# Altium PCB PIFWRobot-Board.PcbDoc
Units mil, origin at the board's own origin, x right, y up, seen from the top; angles counter-clockwise.
Board outline 6000 x 4000 mil, 2 copper layers (Top Layer, Bottom Layer); 141 components, 106 nets, 462 pads, 0 vias.
Unrouted connection lines stored in the file: 224.
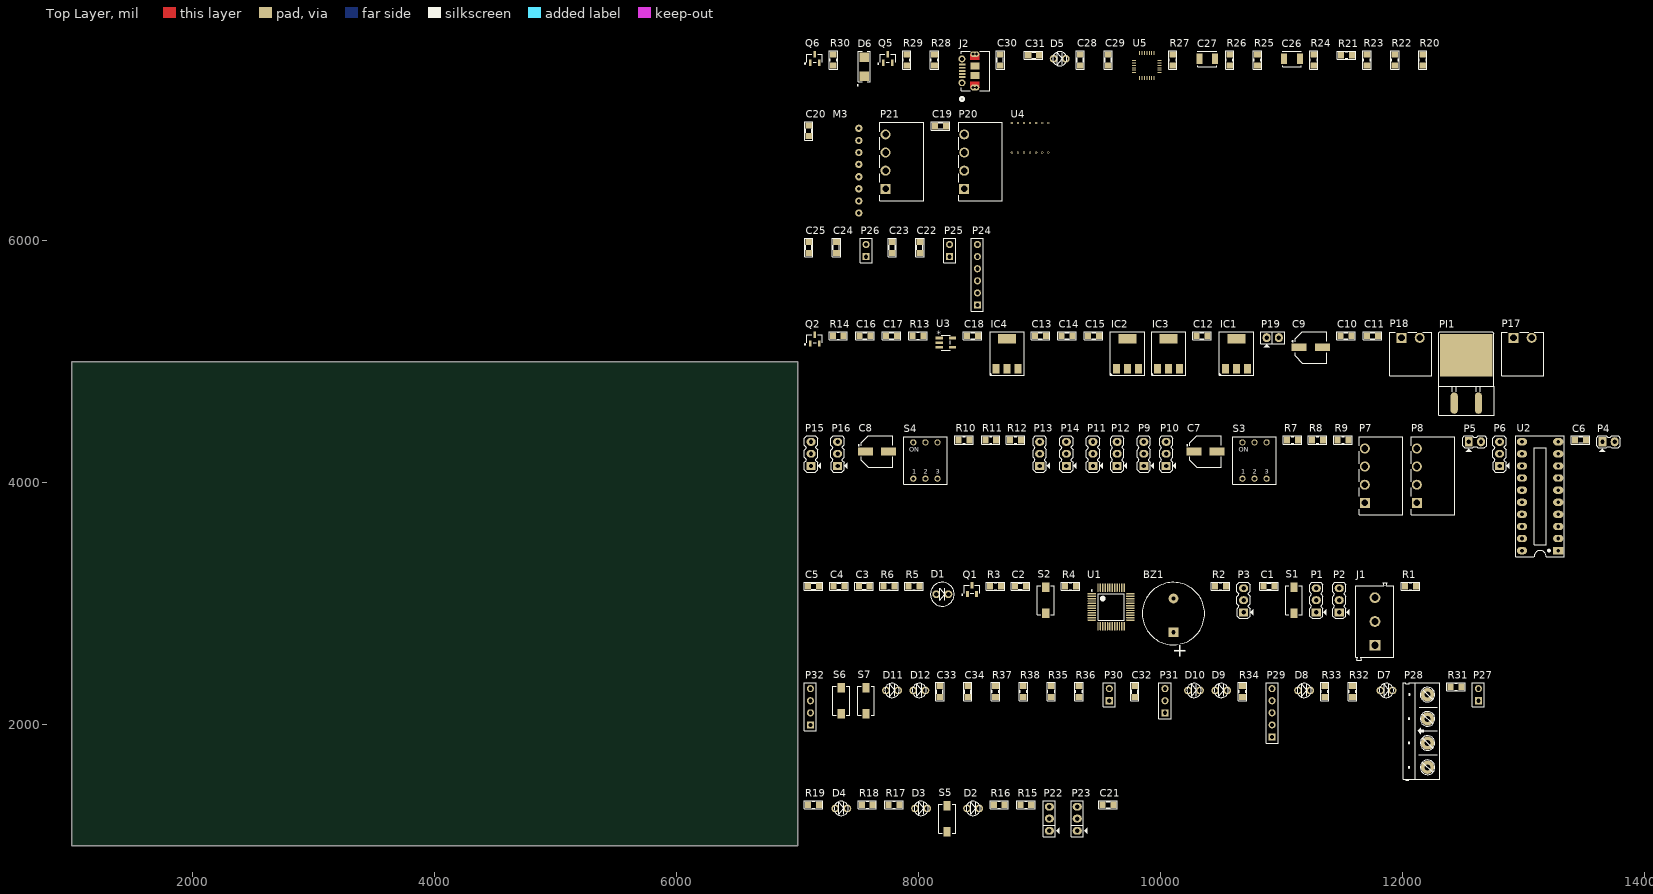
[diagram p0: Top Layer view]
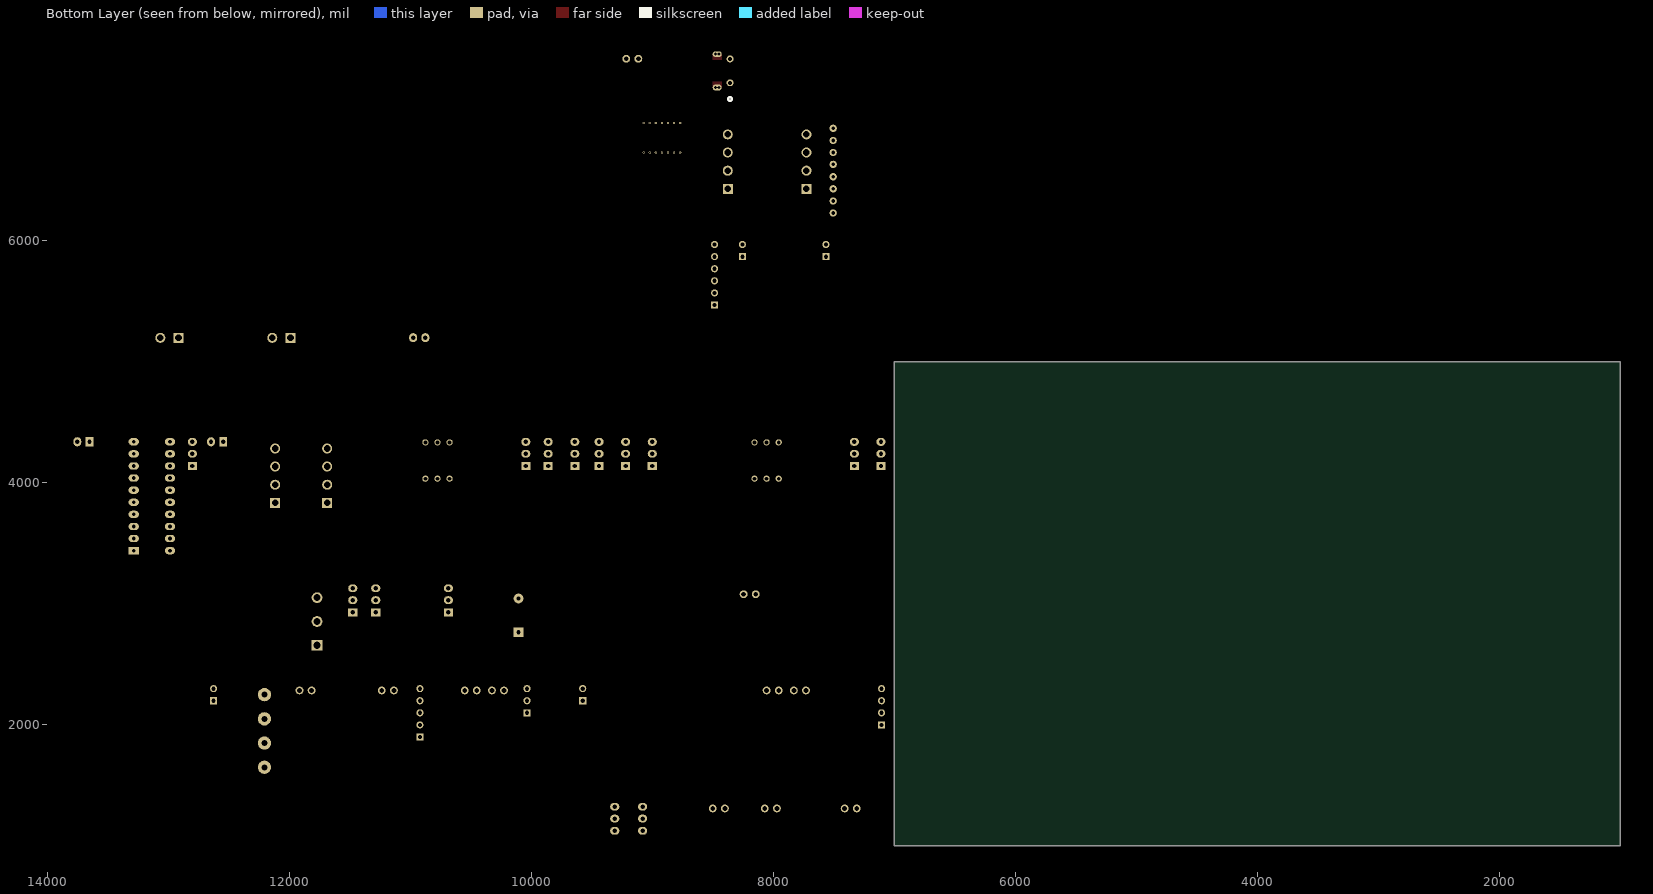
[diagram p1: Bottom Layer view, seen from below]

## Layer stack, top to bottom
Top Solder: solder mask 0.4, Solder Resist, Dk 3.5
Top Layer: signal copper 1.4
Dielectric 1: dielectric 12.6, FR-4, Dk 4.8
Bottom Layer: signal copper 1.4
Bottom Solder: solder mask 0.4, Solder Resist, Dk 3.5

## Board outline
1000,1000 7000,1000 7000,5000 1000,5000

## Design rules (kind name [scope] priority, off if disabled: settings)
Clearance [All] p1: gap=10 ignorepadtopadclearanceinfootprint=FALSE except(0: Arc-Hole Track-Hole SMDPad-Hole THPad-Hole Via-Hole Fill-Hole Poly-Hole Region-Hole Text-Hole)
PolygonConnect [All] p1: connectstyle=Relief reliefconductorwidth=10 reliefentries=4 polygonreliefangle="90 Angle" airgapwidth=10
RoomDefinition WIFI [InComponentClass('WIFI')] p1: confinementstyle=ConfineIn formatcopy=TRUE lockcomponents=FALSE outline 7045,7140 12315,7140 12315,7680 7045,7680
RoomDefinition SENSOR [InComponentClass('SENSOR')] p2: confinementstyle=ConfineIn formatcopy=TRUE lockcomponents=FALSE outline 7045,6180 9100,6180 9100,7095 7045,7095
RoomDefinition RF [InComponentClass('RF')] p3: confinementstyle=ConfineIn formatcopy=TRUE lockcomponents=FALSE outline 7045,5410 8620,5410 8620,6130 7045,6130
RoomDefinition POWER [InComponentClass('POWER')] p4: confinementstyle=ConfineIn formatcopy=TRUE lockcomponents=FALSE outline 7045,4550 13180,4550 13180,5360 7045,5360
RoomDefinition "MOTOR CONTROL" [InComponentClass('MOTOR CONTROL')] p5: confinementstyle=ConfineIn formatcopy=TRUE lockcomponents=FALSE outline 7045,3340 13810,3340 13810,4500 7045,4500
RoomDefinition MCU [InComponentClass('MCU')] p6: confinementstyle=ConfineIn formatcopy=TRUE lockcomponents=FALSE outline 7045,2515 12150,2515 12150,3290 7045,3290
RoomDefinition DECAWAVE [InComponentClass('DECAWAVE')] p7: confinementstyle=ConfineIn formatcopy=TRUE lockcomponents=FALSE outline 7045,1535 12760,1535 12760,2460 7045,2460
RoomDefinition BLUETOOTH [InComponentClass('BLUETOOTH')] p8: confinementstyle=ConfineIn formatcopy=TRUE lockcomponents=FALSE outline 7045,1065 9655,1065 9655,1485 7045,1485
RoutingVias [All] p1: holewidth=28 width=50 viastyle="Through Hole" minholewidth=28 minwidth=50 maxholewidth=28 maxwidth=50
SolderMaskExpansion [All] p1: expansion=4
Width [All] p1: maxlimit=10 minlimit=10 preferedwidth=10
30 further rules are at their usual default settings.

## Classes and differential pairs
component class WIFI: C26 C27 C28 C29 C30 C31 D5 D6 J2 M10 Q3 Q4 Q5 Q6 R20 R21 R22 R23 R24 R25 R26 R27 R28 R29 R30 U5
component class SENSOR: C19 C20 M3 P20 P21 U4
component class RF: C22 C23 C24 C25 M6 M7 M8 M9 P24 P25 P26
component class POWER: C9 C10 C11 C12 C13 C14 C15 C16 C17 C18 IC1 IC2 IC3 IC4 P17 P18 P19 PI1 Q2 R13 R14 U3
component class "MOTOR CONTROL": C6 C7 C8 M1 M2 P4 P5 P6 P7 P8 P9 P10 P11 P12 P13 P14 P15 P16 R7 R8 R9 R10 R11 R12 S3 S4 U2
component class MCU: BZ1 C1 C2 C3 C4 C5 D1 J1 P1 P2 P3 Q1 R1 R2 R3 R4 R5 R6 S1 S2 U1
component class DECAWAVE: C32 C33 C34 D7 D8 D9 D10 D11 D12 P27 P28 P29 P30 P31 P32 R31 R32 R33 R34 R35 R36 R37 R38 S6 S7 U6
component class BLUETOOTH: * C21 D2 D3 D4 M5 P22 P23 R15 R16 R17 R18 R19 S5

## Components (designator, comment, footprint, x,y, rotation, side; value= is the part's Value field where it differs from the comment)
BZ1 "Buzzer" BUZZER 10105,2765 r90 top
C1 "Cap-100nF-50V-0805" CAP-SM-0805 10850,3145 r0 top value=100nF/50V
C2 "Cap-100nF-50V-0805" CAP-SM-0805 8795,3145 r0 top value=100nF/50V
C3 "Cap-100nF-50V-0805" CAP-SM-0805 7505,3145 r0 top value=100nF/50V
C4 "Cap-100nF-50V-0805" CAP-SM-0805 7295,3145 r0 top value=100nF/50V
C5 "Cap-100nF-50V-0805" CAP-SM-0805 7085,3145 r0 top value=100nF/50V
C6 "Cap-100nF-50V-0805" CAP-SM-0805 13425,4355 r0 top value=100nF/50V
C7 "Cap-Al-100uF-16V-D6L5" CAP-SM-AL-SIZE-D-D6L6 10370,4260 r0 top value=100uF/16V
C8 "Cap-Al-100uF-16V-D6L5" CAP-SM-AL-SIZE-D-D6L6 7655,4260 r0 top value=100uF/16V
C9 "Cap-Al-100uF-16V-D6L5" CAP-SM-AL-SIZE-D-D6L6 11240,5120 r0 top value=100uF/16V
C10 "Cap-10uF-50V-0805" CAP-SM-0805 11485,5215 r0 top value=10uF/50V
C11 "Cap-10uF-50V-0805" CAP-SM-0805 11705,5215 r0 top value=10uF/50V
C12 "Cap-10uF-50V-0805" CAP-SM-0805 10295,5215 r0 top value=10uF/50V
C13 "Cap-10uF-50V-0805" CAP-SM-0805 8960,5215 r0 top value=10uF/50V
C14 "Cap-10uF-50V-0805" CAP-SM-0805 9180,5215 r0 top value=10uF/50V
C15 "Cap-10uF-50V-0805" CAP-SM-0805 9400,5215 r0 top value=10uF/50V
C16 "Cap-10uF-50V-0805" CAP-SM-0805 7510,5215 r0 top value=10uF/50V
C17 "Cap-10uF-50V-0805" CAP-SM-0805 7730,5215 r0 top value=10uF/50V
C18 "Cap-10uF-50V-0805" CAP-SM-0805 8400,5215 r0 top value=10uF/50V
C19 "Cap-100nF-50V-0805" CAP-SM-0805 8135,6950 r0 top value=100nF/50V
C20 "Cap-100nF-50V-0805" CAP-SM-0805 7090,6865 r90 top value=100nF/50V
C21 "Cap-100nF-50V-0805" CAP-SM-0805 9520,1340 r0 top value=100nF/50V
C22 "Cap-100nF-50V-0805" CAP-SM-0805 8010,5900 r90 top value=100nF/50V
C23 "Cap-100nF-50V-0805" CAP-SM-0805 7780,5900 r90 top value=100nF/50V
C24 "Cap-100nF-50V-0805" CAP-SM-0805 7320,5900 r90 top value=100nF/50V
C25 "Cap-100nF-50V-0805" CAP-SM-0805 7090,5900 r90 top value=100nF/50V
C26 "TAJB107M006RNJ" CAP_SM_TAN 11085,7505 r0 top value=100uF/16V
C27 "TAJB107M006RNJ" CAP_SM_TAN 10385,7505 r0 top value=100uF/16V
C28 "Cap-10uF-50V-0805" CAP-SM-0805 9335,7450 r90 top value=10uF/50V
C29 "Cap-100nF-50V-0805" CAP-SM-0805 9565,7450 r90 top value=100nF/50V
C30 "Cap-10uF-50V-0805" CAP-SM-0805 8675,7450 r90 top value=10uF/50V
C31 "Cap-100nF-50V-0805" CAP-SM-0805 8905,7535 r0 top value=100nF/50V
C32 "Cap-100nF-50V-0805" CAP-SM-0805 9785,2230 r90 top value=100nF/50V
C33 "Cap-100nF-50V-0805" CAP-SM-0805 8175,2230 r90 top value=100nF/50V
C34 "Cap-100nF-50V-0805" CAP-SM-0805 8405,2230 r90 top value=100nF/50V
D1 "LED-RED-5MM" LED-5MM-RED 8145,3080 r0 top
D2 "LED-GREEN-3MM" LED-3MM-GREEN 8400,1310 r0 top
D3 "LED-YELLOW-3MM" LED-3MM-YELLOW 7970,1310 r0 top
D4 "LED-RED-3MM" LED-3MM-RED 7310,1310 r0 top
D5 "LED-RED-3MM" LED-3MM-RED 9115,7505 r0 top
D6 "SS14" SS14 7550,7440 r90 top
D7 "LED-RED-3MM" LED-3MM-RED 11815,2285 r0 top
D8 "LED-RED-3MM" LED-3MM-RED 11135,2285 r0 top
D9 "LED-YELLOW-3MM" LED-3MM-YELLOW 10450,2285 r0 top
D10 "LED-GREEN-3MM" LED-3MM-GREEN 10225,2285 r0 top
D11 "LED-RED-3MM" LED-3MM-RED 7730,2285 r0 top
D12 "LED-RED-3MM" LED-3MM-RED 7955,2285 r0 top
IC1 "AMS1117" SOT223 10625,5050 r0 top value=LM317
IC2 "AMS1117" SOT223 9725,5050 r0 top value=LM317
IC3 "AMS1117" SOT223 10065,5050 r0 top value=LM317
IC4 "AMS1117" SOT223 8730,5050 r0 top value=LM317
J1 "691111710003" 691111710003 11770,2855 r90 top
J2 "105017-0001" CONN_105017-0001 8470,7405 r90 top
M3 "GY9250" GY9250 7505,6230 r90 top
P1 "Header 3" JP3#1 11285,3030 r90 top
P2 "Header 3" JP3#1 11475,3030 r90 top
P3 "Header 3" JP3#1 10685,3030 r90 top
P4 "Header 2" JP2#1 13650,4340 r0 top
P5 "Header 2" JP2#1 12545,4340 r0 top
P6 "Header 3" JP3#1 12800,4240 r90 top
P7 "691322310004" 691322310004 11820,4060 r90 top
P8 "691322310004" 691322310004 12250,4060 r90 top
P9 "Header 3" JP3#1 9860,4240 r90 top
P10 "Header 3" JP3#1 10045,4240 r90 top
P11 "Header 3" JP3#1 9440,4240 r90 top
P12 "Header 3" JP3#1 9640,4240 r90 top
P13 "Header 3" JP3#1 9000,4240 r90 top
P14 "Header 3" JP3#1 9220,4240 r90 top
P15 "Header 3" JP3#1 7110,4240 r90 top
P16 "Header 3" JP3#1 7330,4240 r90 top
P17 "691322310002" 691322310002 12990,5065 r0 top
P18 "691322310002" 691322310002 12065,5065 r0 top
P19 "Header 2" JP2#2 10875,5200 r0 top
P20 "691322310004" 691322310004 8510,6655 r90 top
P21 "691322310004" 691322310004 7860,6655 r90 top
P22 "Header 3" JP3#2 9080,1225 r90 top
P23 "Header 3" JP3#2 9310,1225 r90 top
P24 "Header 6" HDR1X6 8485,5470 r90 top
P25 "Header 2" HDR1X2 8255,5870 r90 top
P26 "Header 2" HDR1X2 7565,5870 r90 top
P27 "Header 2" HDR1X2 12625,2200 r90 top
P28 "Header 4" HED4 12205,1650 r90 top
P29 "Header 5" HDR1X5 10920,1900 r90 top
P30 "Header 2" HDR1X2 9575,2200 r90 top
P31 "Header 3" HDR1X3 10035,2100 r90 top
P32 "Header 4" HDR1X4 7105,2000 r90 top
PI1 "L7805" D2PAK 12425,4660 r0 top
Q1 "MMBT3904-1AM" SOT23_NEX 8440,3120 r0 top
Q2 "MMBT3904-1AM" SOT23_NEX 7140,5190 r0 top
Q5 "S8050" SOT23_NEX 7745,7510 r0 top
Q6 "S8050" SOT23_NEX 7140,7510 r0 top
R1 "Res-10k-0805" RES-SM-0805 12020,3145 r0 top value=10K
R2 "Res-10k-0805" RES-SM-0805 10450,3145 r0 top value=10K
R3 "Res-15K-0805" RES-SM-0805 8590,3145 r0 top value=15K
R4 "Res-100K-0805" RES-SM-0805 9210,3145 r0 top value=100K
R5 "Res-100K-0805" RES-SM-0805 7915,3145 r0 top value=100K
R6 "Res-1K-0805" RES-SM-0805 7710,3145 r0 top value=1K
R7 "Res-1K-0805" RES-SM-0805 11045,4355 r0 top value=1K
R8 "Res-1K-0805" RES-SM-0805 11250,4355 r0 top value=1K
R9 "Res-1K-0805" RES-SM-0805 11460,4355 r0 top value=1K
R10 "Res-1K-0805" RES-SM-0805 8330,4355 r0 top value=1K
R11 "Res-1K-0805" RES-SM-0805 8550,4355 r0 top value=1K
R12 "Res-1K-0805" RES-SM-0805 8755,4355 r0 top value=1K
R13 "Res-4.7K-0805" RES-SM-0805 7950,5215 r0 top value=4.7K
R14 "Res-100K-0805" RES-SM-0805 7290,5215 r0 top value=100K
R15 "Res-470-0805" RES-SM-0805 8840,1340 r0 top value=470
R16 "Res-470-0805" RES-SM-0805 8620,1340 r0 top value=470
R17 "Res-470-0805" RES-SM-0805 7750,1340 r0 top value=470
R18 "Res-2.2K-0805" RES-SM-0805 7530,1340 r0 top value=2.2K
R19 "Res-10k-0805" RES-SM-0805 7085,1340 r0 top value=10K
R20 "Res-12K-0805" RES-SM-0805 12165,7450 r90 top value=12K
R21 "Res-1K-0805" RES-SM-0805 11490,7535 r0 top value=1K
R22 "Res-12K-0805" RES-SM-0805 11935,7450 r90 top value=12K
R23 "Res-1K-0805" RES-SM-0805 11705,7450 r90 top value=1K
R24 "Res-12K-0805" RES-SM-0805 11265,7450 r90 top value=12K
R25 "Res-12K-0805" RES-SM-0805 10800,7450 r90 top value=12K
R26 "Res-1K-0805" RES-SM-0805 10570,7450 r90 top value=1K
R27 "Res-12K-0805" RES-SM-0805 10100,7450 r90 top value=12K
R28 "Res-1K-0805" RES-SM-0805 8130,7450 r90 top value=1K
R29 "Res-12K-0805" RES-SM-0805 7900,7450 r90 top value=12K
R30 "Res-12K-0805" RES-SM-0805 7295,7450 r90 top value=12K
R31 "Res-1K-0805" RES-SM-0805 12395,2315 r0 top value=1K
R32 "Res-1K-0805" RES-SM-0805 11585,2230 r90 top value=1K
R33 "Res-1K-0805" RES-SM-0805 11355,2230 r90 top value=1K
R34 "Res-1K-0805" RES-SM-0805 10675,2230 r90 top value=1K
R35 "Res-10k-0805" RES-SM-0805 9095,2230 r90 top value=10K
R36 "Res-10k-0805" RES-SM-0805 9325,2230 r90 top value=10K
R37 "Res-1K-0805" RES-SM-0805 8635,2230 r90 top value=1K
R38 "Res-1K-0805" RES-SM-0805 8865,2230 r90 top value=1K
S1 "434113043826" 434113043826 11100,3030 r90 top
S2 "434113043826" 434113043826 9050,3030 r90 top
S3 "418117170903" 418117170903 10775,4185 r0 top
S4 "418117170903" 418117170903 8055,4185 r0 top
S5 "434113043826" 434113043826 8235,1225 r90 top
S6 "434113043826" 434113043826 7360,2200 r90 top
S7 "434113043826" 434113043826 7565,2200 r90 top
U1 "STM32F103C8T6" LQFP48_N 9590,2975 r0 top
U2 "74HC245" DIP20/W0.3 13285,3440 r90 top
U3 "XC6204B332MR" XC6204/05_SOT-00 8225,5160 r0 top
U4 "74HC14" 74HC14D,652 8770,6730 r0 top
U5 "CP2102" CP2102 9785,7520 r0 top

## Footprints (in the part's own frame and the unit in brackets; to place one, negate y for a bottom-side part, rotate by r counter-clockwise, add the part's x,y. Pads: shape width x height; smd on the part's side, far side on the other; paste and mask are expansions set on the pad)
74HC14D,652 [mm]
  oval 0.49x0.36 hole 0.25: 26(0,0) 26(0,6.2) 26(1.27,0) 26(1.27,6.2) 26(2.54,0) 26(2.54,6.2) 26(3.81,0) 26(3.81,6.2) 26(5.08,0) 26(5.08,6.2) 26(6.35,0) 26(6.35,6.2) 26(7.62,0) 26(7.62,6.2)
  body extent -0.51,0.1 8.13,6.1, height 1.75
418117170903 [mm] "2.54 mm compact THT with flat actuator, 3p"
  round 1.3 hole 0.8: 1(-2.54,-3.81) 2(0,-3.81) 3(2.54,-3.81) 4(2.54,3.81) 5(0,3.81) 6(-2.54,3.81)
  silkscreen extent -4.56,-5 4.56,5, body extent -4.46,-4.95 4.46,4.95, height 5.75
434113043826 [mm] "SMD Tact Switch, body 6x3.5mm"
  rect 2x1.5 smd: 1(-2.7,0) 2(2.7,0)
  silkscreen extent -3,-1.75 3,1.75, body extent -3.65,-1.75 3.65,1.75, height 4.3
691111710003 [mm] "5,00mm - modular - green - Horizontal entry with pressure clamp - 10,0mm height - 03p"
  rect 2.25x2.25 hole 1.5: 1(-5,0)
  round 2.25 hole 1.5: 2(0,0) 3(5,0)
  silkscreen extent -8.1,-4 8.1,4, body extent -8.1,-4 8.1,4, height 11.05
691322310002 [mm] "Horizontal PCB Header, pitch 3.81mm, 02p"
  rect 2.1x2.1 hole 1.4: 1(-1.905,3.4)
  round 2.1 hole 1.4: 2(1.905,3.4)
  silkscreen extent -4.4,-4.6 4.41,4.6, body extent -4.4,-4.6 4.41,4.6, height 7.25
691322310004 [mm] "Horizontal PCB Header, pitch 3.81mm, 04p"
  rect 2.1x2.1 hole 1.4: 1(-5.715,3.4)
  round 2.1 hole 1.4: 2(-1.905,3.4) 3(1.905,3.4) 4(5.715,3.4)
  silkscreen extent -8.21,-4.6 8.22,4.6, body extent -8.21,-4.6 8.21,4.6, height 7.25
BUZZER [mil] "Buzzer"
  rect 80x80 hole 36: 1(1.27,0)
  round 80 hole 36: 2(280,0)
  silkscreen extent -102,-257 412,257
CAP-SM-0805 [mil]
  rect 50x55 smd: 1(0,0) 2(90,0)
  silkscreen extent -32,-34 121,33, body extent 6,-25 84,25, height 31
CAP-SM-AL-SIZE-D-D6L6 [mm] "WH6.6"
  rect 3.15x1.6 smd: 1(-2.45,0) 2(2.45,0)
  silkscreen extent -3.95,-3.3 3.3,3.3, body extent -3.9,-3.4 3.9,3.4, height 5.7
CAP_SM_TAN [mil]
  rect 49.98x87 smd: 1(-65,0) 2(65,0)
  silkscreen extent -78,-64 78,64, body extent -73,-60 73,58, height 85
CONN_105017-0001 [mil]
  rect 16x53 smd: 1(-51.18,112) 2(-25.59,112) 3(0,112) 4(25.59,112) 5(51.18,112)
  round 57 hole 33: 6(-98.43,112.98) 7(98.43,112.98)
  rect 59x75 smd: 10(-39.37,6.68) 11(39.37,6.68)
  oval 48x75 hole 1 mask+0: S_1(-137.8,6.68) S_2(137.8,6.68)
  round 24 hole 24: S_1_H1(-137.8,20.18) S_1_H2(-137.8,-6.82) S_2_H1(137.8,20.18) S_2_H2(137.8,-6.82)
  Top Layer region: 91.8,-30.82 91.8,44.18 137.8,44.18 137.8,-30.82
  Top Layer region: -91.8,-30.82 -91.8,44.18 -137.8,44.18 -137.8,-30.82
  Multi-Layer lines w24: -137.8,20.18 -137.8,-6.82 ; 137.8,20.18 137.8,-6.82
  silkscreen extent -247,-117 162,127, body extent -161,-95 161,118, height 108
CP2102 [mm]
  rect 0.85x0.2 smd: 57(-0.127,-3.275) 57(-0.127,-2.775) 57(-0.127,-2.275) 57(-0.127,-1.775) 57(-0.127,-1.275) 57(-0.127,-0.775) 57(-0.127,-0.275) 57(5.227,-3.275) 57(5.227,-2.775) 57(5.227,-2.275) 57(5.227,-1.775) 57(5.227,-1.275) 57(5.227,-0.775) 57(5.227,-0.275)
  rect 0.2x0.85 smd: 57(1.05,-4.45) 57(1.05,0.85) 57(1.55,-4.45) 57(1.55,0.85) 57(2.05,-4.45) 57(2.05,0.85) 57(2.55,-4.45) 57(2.55,0.85) 57(3.05,-4.45) 57(3.05,0.85) 57(3.55,-4.45) 57(3.55,0.85) 57(4.05,-4.45) 57(4.05,0.85)
  body extent 0,-4.33 5.1,0.77, height 1
D2PAK [mm]
  oval 1.5x4.5 smd: 1(0,0) 3(5.08,0)
  rect 11x9 smd: 2(2.54,10.025)
  silkscreen extent -3.28,-2.54 8.36,15, body extent -2.62,0.05 7.59,13.54, height 3.81
DIP20/W0.3 [mil] "DIP 20, 20 PIN, W 300mil, Pin to pin 100mil"
  rect 60x85 hole 31: 1(0,0)
  oval 60x85 hole 31: 2(100,0) 3(200,0) 4(300,0) 5(400,0) 6(500,0) 7(600,0) 8(700,0) 9(800,0) 10(900,0) 11(900,300) 12(800,300) 13(700,300) 14(600,300) 15(500,300) 16(400,300) 17(300,300) 18(200,300) 19(100,300) 20(0,300)
  silkscreen extent -50,-50 950,350, body extent -91,-18 945,322, height 155
GY9250 [mil]
  round 60 hole 30: 40(0,0) 41(100,0) 42(200,0) 43(300,0) 44(402.2,0) 45(500,0) 46(600,0) 47(700,0)
  body extent -45,-112 755,225, height 718
HDR1X2 [mm] "Connector; Header; 2 Position"
  rect 1.5x1.5 hole 0.9: 1(0,0)
  round 1.5 hole 0.9: 2(2.54,0)
  silkscreen extent -1.27,-1.27 3.81,1.27, body extent -1.27,-1.27 3.81,1.27, height 7
HDR1X3 [mm] "Connector; Header; 3 Position"
  rect 1.5x1.5 hole 0.9: 1(0,0)
  round 1.5 hole 0.9: 2(2.54,0) 3(5.08,0)
  silkscreen extent -1.27,-1.27 6.35,1.27, body extent -1.27,-1.27 6.35,1.27, height 7
HDR1X4 [mm] "Connector; Header; 4 Position"
  rect 1.5x1.5 hole 0.9: 1(0,0)
  round 1.5 hole 0.9: 2(2.54,0) 3(5.08,0) 4(7.62,0)
  silkscreen extent -1.27,-1.27 8.89,1.27, body extent -1.27,-1.27 8.89,1.27, height 7
HDR1X5 [mm] "Connector; Header; 5 Position"
  rect 1.5x1.5 hole 0.9: 1(0,0)
  round 1.5 hole 0.9: 2(2.54,0) 3(5.08,0) 4(7.62,0) 5(10.16,0)
  silkscreen extent -1.27,-1.27 11.43,1.27, body extent -1.27,-1.27 11.43,1.27, height 7
HDR1X6 [mm] "Connector; Header; 6 Position"
  rect 1.5x1.5 hole 0.9: 1(0,0)
  round 1.5 hole 0.9: 2(2.54,0) 3(5.08,0) 4(7.62,0) 5(10.16,0) 6(12.7,0)
  silkscreen extent -1.27,-1.27 13.97,1.27, body extent -1.27,-1.27 13.97,1.27, height 7
HED4 [mil] "Header 4, 4 pin, hight 300mil, Pin to Pin 200, Colour Green"
  round 110 hole 50: 1(0,0) 2(200,0) 3(400.06,0.06) 4(600.39,0.39)
  silkscreen extent -106,-100 700,200
JP2#1 [mil]
  rect 65x75 hole 36: 1(0,0)
  oval 65x75 hole 36: 2(101,0)
  silkscreen extent -49,-81 148,48, body extent -48,-50 148,48, height 323
JP2#2 [mil]
  oval 65x75 hole 36: 1(0,0) 2(101,0)
  silkscreen extent -50,-81 150,50, body extent -48,-50 148,48, height 323
JP3#1 [mil] "Jumper 3"
  rect 65x75 hole 36: 1(-100,0)
  oval 65x75 hole 36: 2(1,0) 3(99,0)
  silkscreen extent -150,-81 149,55, body extent -150,-60 150,55, height 355
JP3#2 [mil] "Jumper 3"
  oval 65x75 hole 36: 1(-100,0) 2(1,0) 3(99,0)
  silkscreen extent -150,-81 150,50, body extent -150,-60 150,55, height 355
LED-3MM-GREEN [mil]
  round 65 hole 40: A(0,0) K(100,0)
  silkscreen extent -9,-59 109,59, body extent -15,-63 114,67, height 250
LED-3MM-RED [mil]
  round 65 hole 40: A(0,0) K(100,0)
  silkscreen extent -9,-59 109,59, body extent -15,-63 114,67, height 250
LED-3MM-YELLOW [mil]
  round 65 hole 40: A(0,0) K(100,0)
  silkscreen extent -9,-59 109,59, body extent -15,-63 114,67, height 250
LED-5MM-RED [mil]
  round 65 hole 40: A(0,0) K(100,0)
  silkscreen extent -48,-98 148,98, body extent -54,-105 155,105, height 370
LQFP48_N [mm] "Thin QFP, 48-Leads, Body 7x7mm, Pitch 0.5mm, IPC Medium Density"
  oval 1.8x0.3 smd: 1(-4.05,2.75) 2(-4.05,2.25) 3(-4.05,1.75) 4(-4.05,1.25) 5(-4.05,0.75) 6(-4.05,0.25) 7(-4.05,-0.25) 8(-4.05,-0.75) 9(-4.05,-1.25) 10(-4.05,-1.75) 11(-4.05,-2.25) 12(-4.05,-2.75) 25(4.05,-2.75) 26(4.05,-2.25) 27(4.05,-1.75) 28(4.05,-1.25) 29(4.05,-0.75) 30(4.05,-0.25) 31(4.05,0.25) 32(4.05,0.75) 33(4.05,1.25) 34(4.05,1.75) 35(4.05,2.25) 36(4.05,2.75)
  oval 0.3x1.8 smd: 13(-2.75,-4.05) 14(-2.25,-4.05) 15(-1.75,-4.05) 16(-1.25,-4.05) 17(-0.75,-4.05) 18(-0.25,-4.05) 19(0.25,-4.05) 20(0.75,-4.05) 21(1.25,-4.05) 22(1.75,-4.05) 23(2.25,-4.05) 24(2.75,-4.05) 37(2.75,4.05) 38(2.25,4.05) 39(1.75,4.05) 40(1.25,4.05) 41(0.75,4.05) 42(0.25,4.05) 43(-0.25,4.05) 44(-0.75,4.05) 45(-1.25,4.05) 46(-1.75,4.05) 47(-2.25,4.05) 48(-2.75,4.05)
  silkscreen extent -4.17,-2.75 2.75,3.57, body extent -3.5,-3.5 3.5,3.5, height 1.6
RES-SM-0805 [mil]
  rect 50x55 smd: 1(0,0) 2(90,0)
  silkscreen extent -31,-34 121,34, body extent -5,-24 95,25, height 20
SOT23_NEX [mil]
  rect 22x52 smd paste+0 mask+4: 1(-37.5,-37.21) 2(37.5,-37.21) 3(0,33.36)
  silkscreen extent -85,-50 64,32, body extent -59,-54 59,44, height 43
SOT223 [mil]
  rect 59x79 smd: 1(-91,-107) 2(0,-107) 3(91,-107)
  rect 150x79 smd: 4(0,141)
  silkscreen extent -141,-161 143,200, body extent -131,-105 135,162, height 51
SS14 [mm] "DO-214-AC/SMA Molded Diode, Body 5.3x2.6mm, IPC Medium Density"
  rect 1.999x1.999 smd: 1(-2,0) 2(2,0)
  silkscreen extent -4.06,-1.22 3.23,1.47, body extent -2.75,-1.4 2.75,1.4, height 2.3
XC6204/05_SOT-00 [mil]
  rect 60x21 smd: 1(-54.75,37.4) 2(-54.75,0) 3(-54.75,-37.4) 4(54.75,-37.4) 5(54.75,37.4)
  silkscreen extent -38,-62 38,62, body extent -56,-57 54,57, height 51

## Part data
C1 C2 C3 C4 C5 C6 C19 C20 C21 C22 C23 C24 C25 C29 C31 C32 C33 C34: "CAP CER 0.1UF 50V Y5V 0805", Manufacturer="Samsung Electro-Mechanics", Manufacturer Part Number=CL21F104ZBCNNNC, Supplier 1 Part Number=1276-1007-1-ND, Local Supplier=thegioiic, Local Supplier Link=https://thegioiic.com/products/tu-100nf-0-1uf-50v-0805, Supplier 1=Digikey, Supplier 1 Link=https://www.digikey.com/product-detail/en/samsung-electro-mechanics/CL21F104ZBCNNNC/1276-1007-1-ND/3889093
C7 C8 C9: "CAP ALUM 100UF 20% 16V SMD", Manufacturer=Nichicon, Manufacturer Part Number=UWX1C101MCL1GB, Supplier 1 Part Number=493-2105-1-ND, Local Supplier=thegioiic, Local Supplier Link=https://thegioiic.com/products/tu-nhom-smd-100uf-16v-d6-3l5-4, Supplier 1=Digikey, Supplier 1 Link=https://www.digikey.com/product-detail/en/nichicon/UWX1C101MCL1GB/493-2105-1-ND/590080
C10 C11 C12 C13 C14 C15 C16 C17 C18 C28 C30: "CAP CER 10UF 50V X5R 0805", Manufacturer=Yageo, Manufacturer Part Number=CC0805KKX5R9BB106, Supplier 1 Part Number=311-3499-2-ND, Local Supplier=thegioiic, Local Supplier Link=https://thegioiic.com/products/tu-10uf-50v-0805, Supplier 1=Digikey, Supplier 1 Link=https://www.digikey.com/product-detail/en/yageo/CC0805KKX5R9BB106/311-3499-2-ND/7164383
C26 C27: library part Cap-Tan-100uF-16V, Manufacturer=Nichicon, Manufacturer Part Number=UWX1C101MCL1GB, Supplier 1 Part Number=493-2105-1-ND, Local Supplier=icdayroi, Local Supplier Link=https://icdayroi.com/tu-tantalum-100uf-16v-smd6032, Supplier 1=Digikey, Supplier 1 Link=https://www.digikey.com/product-detail/en/nichicon/UWX1C101MCL1GB/493-2105-1-ND/590080
D6: library part Diode-SS14, "DIODE SCHOTTKY 40V 1A SMA", Manufacturer="ON Semiconductor", Supplier 1 Part Number=SS14CT-ND, Local Supplier=thegioiic, Local Supplier Link=https://thegioiic.com/products/ss14-sma, Manufacturer Part Number=SS14, Supplier 1=Digikey, Supplier 1 Link=https://www.digikey.com/product-detail/en/on-semiconductor/SS14/SS14CT-ND/965729
IC1 IC2 IC3 IC4: "Available in 1.8V, 2.5V, 2.85V, 3.3V, 5V, and  Adjustable Versions"
J1: "WR-TBL Serie 111 Horizontal Entry Modular, Pressure Clamp, pitch 5mm, 3p", Operating Temperature="-40 to +105degC", Rated Current [UL]=15A, Working Voltage [UL]=250VAC, Application="Pressure Clamp", Compliance="Lead free / RoHS", ComponentLink1Description=Manufacturer, ComponentLink1URL=http://www.we-online.de, ComponentLink2Description=Datasheet, ComponentLink2URL=https://katalog.we-online.de/em/datasheet/691111710003.pdf, Modularity=Yes, Mounting Technology=THT, Packaging=Box, Part Number=691111710003, PCB/Cable/Panel=PCB, Pin Number=3, Pitch=5mm, Published Date="October 2019", Publisher="Wurth Elektronik", Type=Horizontal
J2: "No Description Available", Built_By=EMA_Cory, Copyright="Copyright (C) 2018 Accelerated Designs. All rights reserved", Datasheet=https://www.molex.com/pdm_docs/sd/1050170001_sd.pdf, Manufacturer_Part_Number=105017-0001, RefDes=RefDes, SourceLibrary=Molex_2020-05-26, Type=DEV, Vendor="Molex Connector Corporation"
P1 P2 P3 P6 P9 P10 P11 P12 P13 P14 P15 P16 P22 P23 P31: "Header, 3-Pin", LatestRevisionDate=17-Jul-2002, LatestRevisionNote="Re-released for DXP Platform.", Publisher="Altium Limited"
P4 P5 P19 P25 P26 P27 P30: "Header, 2-Pin", LatestRevisionDate=17-Jul-2002, LatestRevisionNote="Re-released for DXP Platform.", Publisher="Altium Limited"
P7 P8 P20 P21: "WR-TBL Serie 322 Horizontal PCB Header, Pluggable, pitch 3.81mm, 4p", Operating Temperature="-40 to +105degC", Rated Current [UL]=10A, Working Voltage [UL]=300VAC, Application=Pluggable, Compliance=RoHS, ComponentLink1Description=Manufacturer, ComponentLink1URL=http://www.we-online.de, ComponentLink2Description=Datasheet, ComponentLink2URL=https://katalog.we-online.de/em/datasheet/691322310004.pdf, Modularity=No, Mounting Technology=THT, Packaging=Box, Part Number=691322310004, PCB/Cable/Panel=PCB, Pin Number=4, Pitch=3.81mm, Published Date="October 2019", Publisher="Wurth Elektronik", Type=Horizontal
P17 P18: "WR-TBL Serie 322 Horizontal PCB Header, Pluggable, pitch 3.81mm, 2p", Operating Temperature="-40 to +105degC", Rated Current [UL]=10A, Working Voltage [UL]=300VAC, Application=Pluggable, Compliance=RoHS, ComponentLink1Description=Manufacturer, ComponentLink1URL=http://www.we-online.de, ComponentLink2Description=Datasheet, ComponentLink2URL=https://katalog.we-online.de/em/datasheet/691322310002.pdf, Modularity=No, Mounting Technology=THT, Packaging=Box, Part Number=691322310002, PCB/Cable/Panel=PCB, Pin Number=2, Pitch=3.81mm, Published Date="October 2019", Publisher="Wurth Elektronik", Type=Horizontal
P24: "Header, 6-Pin", LatestRevisionDate=17-Jul-2002, LatestRevisionNote="Re-released for DXP Platform.", Publisher="Altium Limited"
P28: library part Hed4, "Header 4 (Green)"
P29: "Header, 5-Pin", LatestRevisionDate=17-Jul-2002, LatestRevisionNote="Re-released for DXP Platform.", Publisher="Altium Limited"
P32: "Header, 4-Pin", LatestRevisionDate=17-Jul-2002, LatestRevisionNote="Re-released for DXP Platform.", Publisher="Altium Limited"
PI1: library part L7805-D2PAK, "LINEAR REGULATOR 5.0V", Supplier Part Number 1=497-1170-6-ND, Supplier 1=Digi-Key
R1 R2 R19 R35 R36: "RES 10K OHM 1% 1/4W 0805", Manufacturer="Stackpole Electronics Inc", Manufacturer Part Number=RNCP0805FTD10K0, Supplier 1 Part Number=RNCP0805FTD10K0CT-ND, Local Supplier=thegioiic, Local Supplier Link=https://thegioiic.com/products/dien-tro-10k-ohm-0805-5, Supplier 1=Digikey, Supplier 1 Link=https://www.digikey.com/product-detail/en/stackpole-electronics-inc/RNCP0805FTD10K0/RNCP0805FTD10K0CT-ND/2240601
R3: "RES 15K OHM 1% 1/4W 0805", Manufacturer="TE Connectivity Passive Product", Manufacturer Part Number=CRGCQ0805F15K, Supplier 1 Part Number=A129763CT-ND, Local Supplier=thegioiic, Local Supplier Link=https://thegioiic.com/products/dien-tro-15k-ohm-0805-1, Supplier 1=Digikey, Supplier 1 Link=https://www.digikey.com/product-detail/en/te-connectivity-passive-product/CRGCQ0805F15K/A129763CT-ND/8577595
R4 R5 R14: "RES 0 OHM JUMPER 0805", Manufacturer="Vishay Dale", Manufacturer Part Number=WSL080500000ZEA9, Supplier 1 Part Number=541-3928-1-ND, Local Supplier=thegioiic, Local Supplier Link=https://thegioiic.com/products/dien-tro-0-ohm-0805-5, Supplier 1=Digikey, Supplier 1 Link=https://www.digikey.com/product-detail/en/vishay-dale/WSL080500000ZEA9/541-3928-1-ND/7423223
R6 R7 R8 R9 R10 R11 R12 R21 R23 R26 R28 R31 R32 R33 R34 R37 R38: "RES 1K OHM 1% 1/4W 0805", Manufacturer="Stackpole Electronics Inc", Manufacturer Part Number=RNCP0805FTD1K00, Supplier 1 Part Number=RNCP0805FTD1K00CT-ND, Local Supplier=thegioiic, Local Supplier Link=https://thegioiic.com/products/dien-tro-1k-ohm-0805-5, Supplier 1=Digikey, Supplier 1 Link=https://www.digikey.com/product-detail/en/stackpole-electronics-inc/RNCP0805FTD1K00/RNCP0805FTD1K00CT-ND/2240568
R13: "RES SMD 4.7K OHM 5% 1/8W 0805", Manufacturer=Yageo, Manufacturer Part Number=RC0805JR-074K7L, Supplier 1 Part Number=311-4.7KARCT-ND, Local Supplier=thegioiic, Local Supplier Link=https://thegioiic.com/products/dien-tro-4-7k-ohm-0805-5, Supplier 1=Digikey, Supplier 1 Link=https://www.digikey.com/product-detail/en/yageo/RC0805JR-074K7L/311-4.7KARCT-ND/731274
R15 R16 R17: "RES 470 OHM JUMPER 0805", Manufacturer=YAG6006CT-ND, Manufacturer Part Number=PE0805FRF7W0R047L, Local Supplier=thegioiic, Local Supplier Link=https://www.thegioiic.com/products/dien-tro-470-kohm-0805-5, Supplier 1=Digikey, Supplier 1 Link=https://www.digikey.com/product-detail/en/yageo/PE0805FRF7W0R047L/YAG6006CT-ND/9696460, Supplier 1 Part Number=YAG6006CT-ND
R18: "RES SMD 2.2K OHM 1% 1/8W 0805", Manufacturer="TE Connectivity Passive Product", Manufacturer Part Number=CRG0805F2K2, Supplier 1 Part Number=A106060CT-ND, Local Supplier=thegioiic, Local Supplier Link=https://thegioiic.com/products/dien-tro-2-2k-ohm-0805-5, Supplier 1=Digikey, Supplier 1 Link=https://www.digikey.com/product-detail/en/te-connectivity-passive-product/CRG0805F2K2/A106060CT-ND/3477706
R20 R22 R24 R25 R27 R29 R30: "RES 12 KOHM JUMPER 0805", Manufacturer="Vishay Thin Film", Manufacturer Part Number=PAT0805E3121BST1, Supplier 1 Part Number=PAT0805E3121BST1-ND, Local Supplier=icdayroi, Local Supplier Link=https://icdayroi.com/dien-tro-12k-0805-1-goi-50-con, Supplier 1=Digikey, Supplier 1 Link=https://www.digikey.com/product-detail/en/vishay-thin-film/PAT0805E3121BST1/PAT0805E3121BST1-ND/2281536
S1 S2 S5 S6 S7: "WS-TASV J-Bend SMT Tact Switch 6x3.5mm, height 4.3mm, 260gf", Operating Temperature="-40 to +85degC", Rated Current=50mA, Rated Voltage=12VDC, ComponentLink1Description=Manufacturer, ComponentLink1URL=http://www.we-online.de, ComponentLink2Description=Datasheet, ComponentLink2URL=https://katalog.we-online.com/em/datasheet/434113043826.pdf, Contact Material="Stainless Steel", Contact Plating=Silver, Height=4.3mm, Mounting Technology=SMT, Operation Force=260gf, Packaging="Tape and Reel", Part Number=434113043826, Published Date="September 2019", Publisher="Wurth Elektronik", Terminal Material="Copper Alloy", Terminal Plating=Silver, Washable=No
S3 S4: "WS-DITV Compact THT Dip Switch, Flat Actuator, pitch 2.54mm, 3p", Operating Temperature="-40 to +85degC", Rated Current Non-Switching=100mA, Rated Current Switching=25mA, Rated Voltage Non-Switching=50VDC, Rated Voltage Switching=24VDC, Actuator Type="Flat Type", Circuit=SPST-NO, ComponentLink1Description=Manufacturer, ComponentLink1URL=http://www.we-online.de, ComponentLink2Description=Datasheet, ComponentLink2URL=https://katalog.we-online.com/em/datasheet/418117170903.pdf, Contact Material="Copper Alloy", Contact Plating=Gold, Mounting Technology=THT, Operation Force=800g, Packaging=Tube, Part Number=418117170903, Pitch=2.54mm, Pole Number=3, Published Date="September 2019", Publisher="Wurth Elektronik"
U1: "STM32 ARM-based 32-bit MCU with 64 Kbytes Flash, 48-pin LQFP, Industrial Temperature", ComponentLink1Description="Manufacturer Link", ComponentLink1URL=www.st.com/stm32, ComponentLink2Description=Datasheet, ComponentLink2URL=http://www.st.com/stonline/products/literature/ds/13587.pdf, DatasheetVersion="rev6, Mar-2008", PackageDescription="48-Pin Low-Profile Quad Flat Pack, 7 x 7 mm Body, 0.5 mm Pitch (LQFP48)", PackageReference=LQFP48, PackageVersion=Mar-2008, Published=30-May-2008, Publisher="Altium Limited"
U2: "Octal bus tranceiver"
U3: Built_By=EMA_UL_Team, Copyright="Copyright (C) 2018 Accelerated Designs. All rights reserved", Manufacturer_Part_Number=XC6204B332MR, RefDes=RefDes, SourceLibrary=Torex_2016-07-05_1, Type=DEV, Vendor="Torex Semiconductor"

## Nets (pads, with @x,y where several pads share a name; then routed paths per layer and width w, separated by ;. In a path a pad name is that pad's centre, name@x,y a point inside that pad or via, vN(x,y) a via of type N, cw(c..) or ccw(c..) an arc to the next point about the centre after c; other vN are vias at no path point)
+3V3-BLUE: C18.2 IC4.2 IC4.4 S5.1
+3V3-DWM: C15.2 C17.2 IC3.2 IC3.4 P30.2 U3.5
+3V3-DWM-M: C32.2 P28.4 R31.2 R32.2 R33.2 R34.2 R35.2 R36.2
+3V3-MC: C3.1 C4.1 C5.1 C13.2 C14.2 C20.2 D1.A IC2.2 IC2.4 P1.1 P2.3 P6.1 R1.2 R2.2 R7.2 R8.2 R9.2 R10.2 R11.2 R12.2 U1.9 U1.24 U1.36 U1.48
+3V3-RF: C22.2 P25.2 P26.2
+5: BZ1.1 C11.2 C16.2 C21.2 C24.2 IC2.3 IC3.3 IC4.3 J1.1 P6.3 P17.1 P19.1 PI1.3 R13.2 U3.1
+5-USB: D6.2 J2.1
+5-WIFI: C30.2 C31.2 D6.1 IC1.3 P19.2
+12: C9.2 C10.2 P4.1 P5.1 P18.1 PI1.1
+12-STEP: C7.1 C8.1 P4.2 P5.2
\: P32.1
BLUE-ENB: R18.2 S5.2 U1.32
BLUE-KEY: R18.1 R19.2
BLUE-RX: U1.30
BLUE-TX: U1.31
BOOT0: P1.2 P2.2 P24.3 R4.2 U1.19
CP2102-DTR: Q6.2 R29.1
CP2102-RTS: Q5.2 R30.2
DWM-BLUE-WAKE: C34.2 R36.1 S7.1
DWM-nRST: C33.2 P27.1 R35.1 S6.1
DWM-READY: 
DWM-RX: 
DWM-SCL: P31.1
DWM-SDA: P31.2
DWM-SPI-CLK: P29.3
DWM-SPI-CSn: P29.2
DWM-SPI-MISO: P29.5
DWM-SPI-MOSI: P29.4
DWM-SWCLK: P28.2
DWM-SWDIO: P28.1
ESP-ENB: C12.2 C26.1 C27.1 C28.2 C29.2 IC1.2 IC1.4 R20.1 R20.2 R22.1 R22.2 R23.2 R24.1 R24.2 R25.1 R25.2
ESP-GPIO15: C1.1 C2.2 C3.2 C4.2 C5.2 C6.1 C7.2 C8.2 C9.1 C10.1 C11.1 C12.1 C13.1 C14.1 C15.1 C16.1 C17.1 C18.1 C19.1 C20.1 C21.1 C22.1 C23.1 C24.1 C25.1 C26.2 C27.2 C28.1 C29.1 C30.1 C31.1 C32.1 C33.1 C34.1 D2.K D3.K D4.K D11.K D12.K IC1.1 IC2.1 IC3.1 IC4.1 J1.3 J2.5 P1.3 P2.1 P3.3 P11.3 P12.3 P15.3 P16.3 P17.2 P18.2 P20.4 P21.4 P23.3 P24.1 P27.2 P28.3 P29.1 P31.3 P32.4 PI1.2 Q1.2 Q2.2 R19.1 R27.1 R27.2 R28.1 S1.2 S2.2 S3.1 S3.2 S3.3 S4.1 S4.2 S4.3 S6.2 S7.2 U1.8 U1.23 U1.35 U1.47 U2.10 U2.19 U3.2
ESP-RX: R23.1
ESP-TX: U1.13
NetBZ1_2: BZ1.2 Q1.3
NetC2_1: C2.1 R2.1 S2.1
NetC23_2: C23.2 P24.6 P25.1
NetC25_2: C25.2 P26.1
NetD2_A: D2.A R15.2
NetD3_A: D3.A R16.2
NetD4_A: D4.A R17.2
NetD5_A: D5.A
NetD5_K: D5.K R28.2
NetD7_A: D7.A R31.1
NetD7_K: D7.K
NetD8_A: D8.A R32.1
NetD8_K: D8.K
NetD9_A: D9.A R33.1
NetD9_K: D9.K
NetD10_A: D10.A R34.1
NetD10_K: D10.K
NetD11_A: D11.A R37.1
NetD12_A: D12.A R38.1
NetM1_2: R7.1 S3.6
NetM1_3: R8.1 S3.5
NetM1_4: R9.1 S3.4
NetM2_2: R10.1 S4.6
NetM2_3: R11.1 S4.5
NetM2_4: R12.1 S4.4
NetM3_3: U1.45
NetM3_4: U1.46
NetM5_11: U1.14
NetM5_24: R17.1
NetM5_31: R16.1
NetM5_32: R15.1
NetM6_3: 
NetM6_4: U1.38
NetM6_5: U1.39
NetM6_6: U1.41
NetM6_7: U1.40
NetM6_8: U1.33
NetP30_1: P30.1
NetQ1_1: Q1.1 R3.2
NetQ2_1: Q2.1 R14.2
NetQ2_3: Q2.3 R13.1
NetQ3_1: R21.2
NetQ4_1: R26.2
NetQ5_1: Q5.1 R29.2
NetQ6_1: Q6.1 R30.1
NetR4_1: R4.1 U1.20
NetR5_2: R5.2 U1.44
NetR14_1: R14.1 U1.15
NetR21_1: R21.1 U1.12
NetR26_1: R26.1
NetU1_3: U1.3 U2.3
NetU1_4: U1.4 U2.6
NetU1_5: U1.5 U2.5
NetU1_6: U1.6 U2.7
NetU1_10: U1.10
NetU1_11: U1.11 U2.4
NetU1_16: U1.16
NetU1_17: U1.17
NetU1_25: U1.25
NetU1_26: U1.26
NetU1_27: U1.27
NetU1_28: U1.28
NetU1_42: U1.42
NetU1_43: U1.43
NetU2_2: U2.2
NetU4_6: 
NetU4_8: 
NRST: C1.2 R1.1 S1.1
RF-CS: P24.2
RF-RXD: P24.5 U1.21
RF-TXD: P24.4 U1.22
VCC-245: C6.2 U2.1 U2.20
pads on no net: C19.2 D1.K J1.2 J2.2 J2.3 J2.4 J2.6 J2.7 J2.10 J2.11 J2.S_1 J2.S_1_H1 J2.S_1_H2 J2.S_2 J2.S_2_H1 J2.S_2_H2 M3.40 M3.41 M3.42 M3.43 M3.44 M3.45 M3.46 M3.47 P3.1 P3.2 P6.2 P7.1 P7.2 P7.3 P7.4 P8.1 P8.2 P8.3 P8.4 P9.1 P9.2 P9.3 P10.1 P10.2 P10.3 P11.1 P11.2 P12.1 P12.2 P13.1 P13.2 P13.3 P14.1 P14.2 P14.3 P15.1 P15.2 P16.1 P16.2 P20.1 P20.2 P20.3 P21.1 P21.2 P21.3 P22.1 P22.2 P22.3 P23.1 P23.2 P32.2 P32.3 Q5.3 Q6.3 R3.1 R5.1 R6.1 R6.2 R37.2 R38.2 U1.1 U1.2 U1.7 U1.18 U1.29 U1.34 U1.37 U2.8 U2.9 U2.11 U2.12 U2.13 U2.14 U2.15 U2.16 U2.17 U2.18 U3.3 U3.4 U4.26 U5.57

## Text inside footprints (layer, text, board x,y; h text height)
BZ1: Top Overlay "+" at 10205,2545 h112.5 r90
S3: Top Overlay "3" at 10860.43,4074.76 h40; Top Overlay "ON" at 10643.5,4255.87 h40; Top Overlay "1" at 10665.94,4074.76 h40; Top Overlay "2" at 10760.43,4074.76 h40; Mechanical 13 "3" at 10860.43,4074.76 h40; Mechanical 13 "1" at 10665.94,4074.76 h40; Mechanical 13 "ON" at 10643.5,4255.87 h40; Mechanical 13 "2" at 10760.43,4074.76 h40
S4: Top Overlay "3" at 8140.43,4074.76 h40; Top Overlay "ON" at 7923.5,4255.87 h40; Top Overlay "1" at 7945.94,4074.76 h40; Top Overlay "2" at 8040.43,4074.76 h40; Mechanical 13 "3" at 8140.43,4074.76 h40; Mechanical 13 "1" at 7945.94,4074.76 h40; Mechanical 13 "ON" at 7923.5,4255.87 h40; Mechanical 13 "2" at 8040.43,4074.76 h40
U3: Top Overlay "*" at 8147.75,5209.4 h50